# Altium PCB HS-1025_MAIN_PCB增加测试点修改_2025-04-26.pcbdoc (part 2 of 2)
Units mm, origin at the board's own origin, x right, y up, seen from the top; angles counter-clockwise.
Board outline 70 x 96.4 mm, 2 copper layers (Top Layer, Bottom Layer); 113 components, 41 nets, 228 pads, 296 vias.
Unrouted connection lines stored in the file: 1.
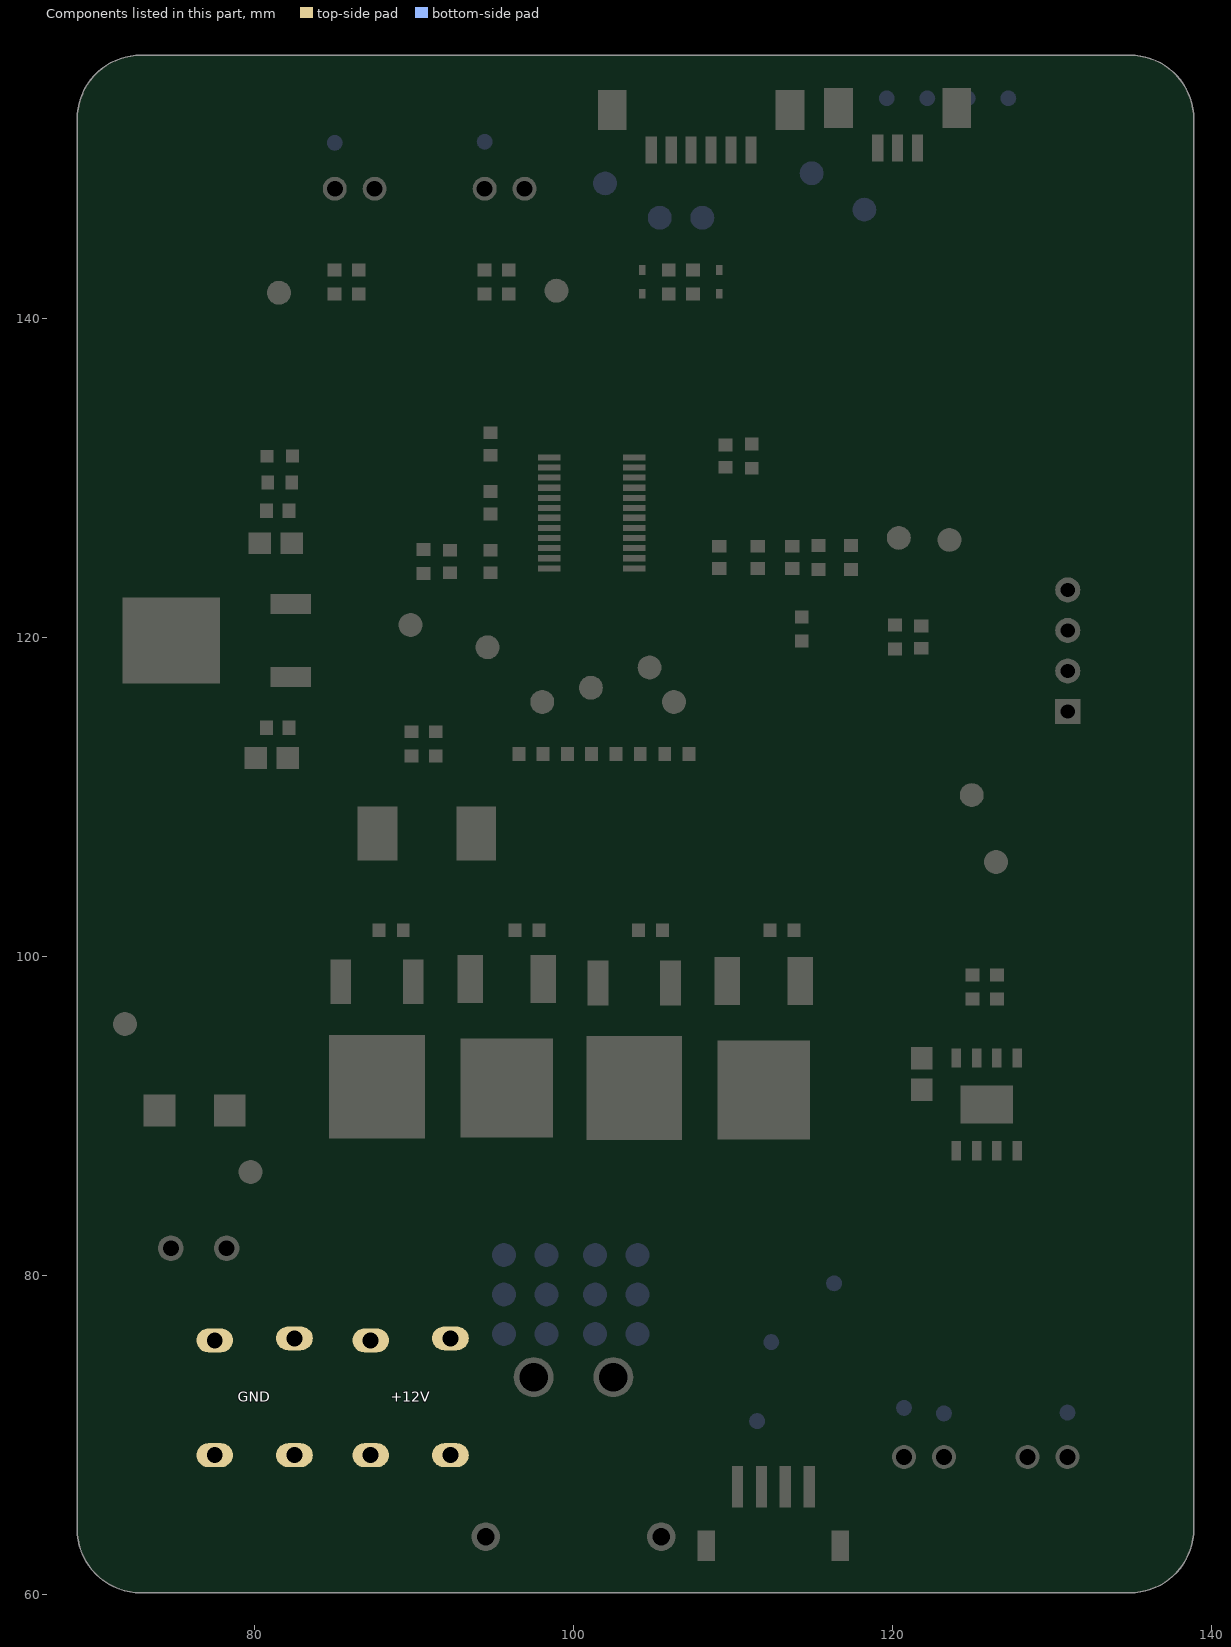
[diagram p2: the components of this part, seen from the top]

## Via types
v1: diameter 0.62, hole 0.31, Top Layer to Bottom Layer, tented both sides, 285 vias
v2: diameter 0.6, hole 0.406, Top Layer to Bottom Layer, 5 vias
v3: diameter 0.62, hole 0.31, Top Layer to Bottom Layer, 2 vias
v4: diameter 0.508, hole 0.35, Top Layer to Bottom Layer, 2 vias
v5: diameter 0.5, hole 0.35, Top Layer to Bottom Layer, 1 vias
v6: diameter 0.6, hole 0.4, Top Layer to Bottom Layer, 1 vias

## Nets (pads, with @x,y where several pads share a name; then routed paths per layer and width w, separated by ;. In a path a pad name is that pad's centre, name@x,y a point inside that pad or via, vN(x,y) a via of type N, cw(c..) or ccw(c..) an arc to the next point about the centre after c; other vN are vias at no path point) (continued)
pads on no net: EC25.1 EC25_1.1 EC25_1_1.1 EC25_2.1 EC25_2_1.1 EC25_3.1 EC29.1 EC29_1.1 EC29_1_1.1 EC29_2.1 EC29_2_1.1 EC29_3.1 EC87.1 EC116.1 EC117.1 EC118.1 EC119.1 EC120.1 EC121.1 EC122.1 EC123.1 EC125.1 EC126.1 EC127.1 FAN.5 FAN.6 TEC1.3 TEC1.4 U8.10 U8.11
copper on no net: | length 52.6
  Top Layer w0.3: 97.403,129.377 96.819,129.962 97.404,129.377 ; 97.403,129.377 98.47,129.377 97.404,129.377
  Bottom Layer w0.3: 96.82,129.962 105.869,129.962 107.488,128.343 107.488,124.501 108.545,123.444 123.436,123.444 124.333,122.547 ; 110.272,69.378 110.363,69.469 ; 112.395,75.819 112.454,75.76 112.454,74.422 ; 116.332,79.502 117.983,79.502 ; 123.884,122.995 126.443,120.437 130.983,120.437 ; 124.363,152.4 124.714,152.751 124.714,153.797 124.46,153.543 ; 126.903,152.146 127.254,152.497 127.254,153.797
  Bottom Layer w0.8: 110.272,68.453 110.272,69.378

## Polygon pours and split planes (outlines as drawn)
TEC_OUT1 on Bottom Layer "Bottom Layer-TEC_OUT1" (solid, pour order 10): 100.068,69.596 105.402,69.596 105.402,82.55 106.672,83.82 114.8,83.82 114.8,93.853 100.068,93.853 100.068,69.596
TEC_OUT2 on Bottom Layer "Bottom Layer-TEC_OUT2" (solid, pour order 8): 94.48,69.596 99.306,69.596 99.306,93.853 83.177,93.853 83.177,84.201 83.431,83.947 92.956,83.947 94.48,82.423 94.48,69.596
+12V on Bottom Layer "Bottom Layer-+12V" (solid, pour order 6): 81.907,97.409 104.386,97.409 104.386,97.028 104.386,94.107 82.288,94.107 81.399,93.345 81.399,96.774 81.526,96.901
+12V on Bottom Layer "Bottom Layer-+12V 1" (solid, pour order 4): 85.336,67.056 94.226,67.056 94.226,82.296 92.829,83.693 83.177,83.693 82.796,84.074 82.796,95.123 82.669,96.901 82.669,102.87 82.796,102.997 76.573,102.997 76.573,79.121 77.208,78.486 84.828,78.486 85.336,77.978 85.336,67.056
+12V on Bottom Layer "Bottom Layer-+12V 2" (solid, pour order 0): 79.675,96.688 79.675,103.038 104.386,102.997 104.386,96.647 79.675,96.688
GND on Bottom Layer "GND_L02_P034" (solid, remove dead copper, pour order 34): 140.208,148.082 140.208,155.702 ccw(c137.668,155.702) 137.668,158.242 92.964,158.242 69.596,158.242 ccw(c69.596,155.702) 67.056,155.702 67.056,148.717 67.056,60.833 ccw(c69.596,60.833) 69.596,58.293 76.708,58.293 137.668,58.293 ccw(c137.668,60.833) 140.208,60.833 140.208,61.595 140.208,142.24
GND on Top Layer "Top Layer-GND 1" (solid, pour order 30): 76.192,67.437 76.192,77.216 76.065,77.343 84.447,77.343 84.447,67.564 76.319,67.564 76.192,67.437
GND on Top Layer "Top Layer-GND 2" (solid, pour order 28): 89.781,110.109 89.527,110.109 84.701,110.109 84.701,105.664 84.574,105.537 89.781,105.537 89.781,109.982
+12V on Top Layer "Top Layer-+12V" (solid, pour order 26): 76.627,94.402 83.177,95.123 84.628,96.688 88.057,96.688 88.057,99.99 88.057,103.038 76.573,102.997 76.573,101.473 76.573,99.949 76.573,95.377 76.573,94.996 76.573,94.361
NetQ3_3 on Top Layer "Top Layer-Q3_3" (solid, pour order 24): 92.692,96.497 96.82,96.561 96.82,107.737 92.057,107.8 92.057,96.497
NetQ3_3 on Top Layer "Top Layer-Q3_3 1" (solid, pour order 22): 112.895,95.885 112.822,109.642 112.314,110.15 91.994,110.15 91.994,105.324 107.742,105.324 108.25,104.816 108.323,95.885
TEC_OUT2 on Top Layer "Top Layer-TEC_OUT2" (solid, pour order 20): 84.32,95.123 99.179,95.123 99.306,69.596 98.925,69.596 94.861,69.596 94.48,69.596 94.48,82.423 92.956,83.947 84.447,83.947 84.193,84.201 84.193,94.996 84.193,95.123
TEC_OUT1 on Top Layer "Top Layer-TEC_OUT1" (solid, pour order 18): 100.068,69.596 100.068,95.123 114.927,95.123 114.8,83.82 106.672,83.82 105.402,82.55 105.402,69.596 100.449,69.596 100.322,69.596
+12V on Top Layer "Top Layer-+12V 1" (solid, pour order 16): 99.741,96.307 99.741,103.038 104.44,103.038 104.513,95.885 99.941,95.885 99.814,95.885
+12V on Top Layer "Top Layer-+12V 2" (solid, pour order 14): 93.972,79.502 93.972,76.327 93.972,74.676 93.972,73.025 93.972,66.929 85.336,66.929 85.336,77.343 84.882,77.765 77.008,77.765 76.573,78.232 76.573,83.312 84.066,83.439 92.829,83.439 93.972,82.296 93.972,81.026
+12V on Top Layer "Top Layer-+12V 3" (solid, pour order 12): 76.573,95.504 76.573,91.694 76.573,87.757 76.573,80.01 85.644,80.178 85.59,80.772 85.463,81.661 83.685,84.074 83.685,95.758
GND on Top Layer "GND_L01_P032" (solid, remove dead copper, pour order 32): 140.208,148.082 140.208,155.702 ccw(c137.668,155.702) 137.668,158.242 92.964,158.242 69.596,158.242 ccw(c69.596,155.702) 67.056,155.702 67.056,148.717 67.056,60.833 ccw(c69.596,60.833) 69.596,58.293 76.708,58.293 137.668,58.293 ccw(c137.668,60.833) 140.208,60.833 140.208,61.595 140.208,142.24

## Keep-outs
Keep-Out Layer:
  circle w0.254: c72.999,64.169 r1.6
  circle w0.254: c134.999,64.169 r1.1
  circle w0.254: c134.999,152.569 r1.6
  circle w0.254: c72.999,152.569 r1.55
  lines w0.254: 68.878,64.099 ccw(c72.88,64.1) 72.878,60.099 134.878,60.099 ccw(c134.879,64.099) 138.878,64.099 138.878,152.499 ccw(c134.88,152.501) 134.878,156.499 72.878,156.499 ccw(c72.878,152.499) 68.878,152.499 68.879,64.099

## Other copper
Top Layer:
  region net NetC10_2: 119.639,126.191 120.435,126.987 119.772,127.066 119.56,126.854
  region net NetC9_2: 98.551,141.082 98.327,142.185 97.894,141.679 97.955,141.379
  region net NetC8_2: 82.063,142.129 81.979,141.007 82.533,141.379 82.555,141.679
  region net NetR9_2: 97.496,115.43 98.62,115.481 98.232,114.938 97.932,114.924
  region net NetR6_2: 100.544,116.319 101.668,116.37 101.257,115.826 101.003,115.814
  region net NetR6_2: 100.544,117.361 101.668,117.31 101.257,117.854 101.003,117.866
  region net NetR10_1: 104.748,117.36 104.025,118.223 103.902,117.552 104.066,117.357
  region net NetR10_1: 105.517,118.129 104.654,118.851 105.325,118.975 105.52,118.811
  region net NetR5_1: 106.479,115.225 105.547,115.855 105.592,115.191 105.846,115.019
  region net NetR5_1: 106.405,116.692 105.541,115.972 105.592,116.531 105.846,116.743
  region net NetR24_2: 95.328,119.172 94.723,120.121 95.387,120.056 95.549,119.802
  region net NetR24_2: 94.491,120.121 93.886,119.172 93.665,119.802 93.827,120.056
  region net NetR28_2: 90.334,121.283 90.214,120.165 90.562,120.489 90.605,120.892
  region net NetR28_2: 89.251,120.246 90.374,120.318 90.026,119.954 89.642,119.929
  region net NetR22_2: 131.525,69.117 130.4,69.117 130.813,69.642 131.113,69.642
  region net NetPUMP1_2: 123.778,69.117 122.653,69.117 122.965,69.642 123.465,69.642
  region net NetPUMP1_1: 121.278,69.117 120.153,69.117 120.466,69.642 120.966,69.642
  region net NetNTC2_2: 94.987,147.624 93.862,147.629 94.273,147.102 94.573,147.101
  region net NetNTC1_2: 85.589,147.624 84.464,147.629 84.875,147.102 85.175,147.101
  region net GND: 131.504,123.567 131.503,122.386 132.055,122.827 132.055,123.127
  region net +12V: 78.779,82.302 78.779,81.102 79.339,81.575 79.339,81.829
  region net NetR11_1: 124.424,109.584 125.548,109.643 125.163,109.097 124.863,109.081
  region net NetR11_1: 124.424,110.634 125.548,110.575 125.163,111.121 124.863,111.137
  region net NetR12_1: 125.948,105.393 127.072,105.452 126.687,104.906 126.387,104.89
  region net NetR12_1: 125.948,106.443 127.072,106.384 126.687,106.93 126.387,106.946
  region net NetCN1_3: 116.998,147.255 116.998,147.72 117.215,147.688 117.215,147.288
  region net NetCN1_3: 116.588,147.255 116.588,147.72 116.371,147.688 116.371,147.288
  region net NetCN1_2: 113.75,148.271 113.75,148.736 113.967,148.704 113.967,148.304
  region net NetCN1_2: 113.34,148.271 113.34,148.736 113.123,148.704 113.123,148.304
  region net NetCN1_4: 107.138,147.675 107.603,147.675 107.57,147.892 107.17,147.892
  region net NetCN1_4: 107.138,147.265 107.603,147.265 107.57,147.048 107.17,147.048
  region net NetCN1_5: 105.888,147.284 106.353,147.284 106.321,147.067 105.921,147.067
  region net NetCN1_5: 105.888,147.694 106.353,147.694 106.321,147.911 105.921,147.911
  region net VCC5V: 117.599,120.995 117.137,121.048 117.266,121.252 117.52,121.222
  region net +12V: 83.704,112.721 83.376,113.049 83.174,112.944 83.599,112.519
  region net +12V: 83.704,112.196 83.376,111.868 83.174,111.973 83.599,112.398
  region net VCC5V: 92.277,127.506 92.275,127.971 92.492,127.989 92.494,127.489
  region net VCC5V: 91.866,127.971 91.865,127.506 91.648,127.489 91.649,127.989
  region net NetFAN_3: 99.79,128.459 99.79,128.924 99.573,128.842 99.573,128.542
  region: 97.129,129.981 96.8,129.652 97.012,129.557 97.224,129.769
  region net NetC9_2: 97.03,141.291 97.019,141.756 97.238,141.679 97.245,141.379
  region net NetC9_2: 96.62,141.756 96.609,141.291 96.394,141.379 96.401,141.679
  region net NetC9_2: 96.615,141.286 96.615,141.751 96.398,141.669 96.398,141.369
  region net NetC8_2: 83.661,141.761 83.66,141.296 83.443,141.379 83.444,141.679
  region net NetC8_2: 84.072,141.296 84.07,141.761 84.287,141.679 84.288,141.379
  region net NetC8_2: 84.072,141.296 84.07,141.761 84.287,141.679 84.288,141.379
  region net NetC8_2: 109.986,125.511 109.918,125.971 109.715,125.86 109.759,125.56
  region net NetC9_2: 112.274,125.905 112.202,125.446 112,125.56 112.048,125.86
  region net NetR22_2: 118.163,125.612 118.014,126.053 117.832,125.913 117.933,125.613
  region net NetR22_2: 128.845,125.693 129.31,125.693 129.228,125.476 128.928,125.476
  region net +12V: 89.659,124.225 89.659,123.76 89.876,123.843 89.876,124.143
  region net +12V: 93.85,125.749 93.85,125.284 94.067,125.367 94.067,125.667
  region net NetR9_2: 98.318,114.169 97.853,114.16 97.932,114.379 98.232,114.385
  region net NetR9_2: 98.318,113.75 97.853,113.759 97.932,113.541 98.232,113.535
  region net NetR9_2: 98.321,113.753 97.856,113.756 97.96,113.539 98.214,113.537
  region net NetR9_2: 97.179,123.69 96.714,123.69 96.819,123.865 97.073,123.866
  region net NetQ1_1: 104.417,111.754 103.952,111.75 104.055,111.968 104.309,111.97
  region net NetQ1_1: 105.807,103.722 105.342,103.722 105.448,103.505 105.702,103.505
  region net NetQ4_1: 99.848,111.75 99.383,111.754 99.49,111.97 99.744,111.968
  region net NetQ4_1: 98.363,103.744 98.034,104.073 97.955,103.845 98.135,103.666
  region net NetQ2_1: 96.8,111.75 96.335,111.754 96.442,111.97 96.696,111.968
  region net NetQ2_1: 90.308,103.958 89.98,104.286 89.901,104.058 90.08,103.879
  region net +12V: 80.456,96.759 80.127,97.088 80.048,96.86 80.228,96.681
  region net NetCN1_3: 120.665,149.832 119.964,149.832 120.114,149.232 120.514,149.232
  region net NetCN1_2: 119.415,149.832 118.714,149.832 118.865,149.232 119.265,149.232
  region net NetCN1_4: 107.721,149.705 107.02,149.705 107.17,149.105 107.57,149.105
  region net NetCN1_3: 108.971,149.705 108.272,149.705 108.42,149.105 108.82,149.105
  region net NetCN1_2: 110.22,149.705 109.522,149.705 109.67,149.105 110.07,149.105
  region net NetCN1_5: 106.471,149.705 105.77,149.705 105.921,149.105 106.321,149.105
  region net VCC5V: 105.222,149.705 104.521,149.705 104.521,149.189 105.221,149.189
  region net NetC7_1: 127.508,94.226 128.107,94.226 127.957,94.676 127.657,94.676
  region net NetR12_2: 126.238,94.226 126.837,94.226 126.687,94.676 126.387,94.676
  region net NetR11_2: 124.968,94.226 125.567,94.226 125.417,94.676 125.117,94.676
  region net NetPUMP1_1: 124.297,87.211 123.698,87.211 123.747,86.461 124.247,86.461
  region net NetPUMP1_2: 128.107,87.211 127.508,87.211 127.557,86.461 128.057,86.461
  region net VCC5V: 81.028,122.725 83.528,122.725 82.778,124.225 81.778,124.225
  region net +12V: 83.528,116.878 81.028,116.878 81.778,115.654 82.778,115.654
  region net NetR28_2: 89.517,114.48 90.152,114.48 89.961,114.861 89.707,114.861
  region net GND: 89.517,112.169 90.152,112.169 89.961,111.788 89.707,111.788
  region net NetD3_2: 107.862,141.125 107.112,141.125 107.337,140.675 107.637,140.675
  region net NetD3_2: 107.919,141.904 107.919,141.154 108.369,141.379 108.369,141.679
  region net NetCN1_4: 107.87,143.436 107.055,143.436 107.17,144.036 107.57,144.036
  region net NetD2_2: 106.338,141.125 105.588,141.125 105.813,140.675 106.113,140.675
  region net NetD2_2: 105.531,141.154 105.531,141.904 105.081,141.68 105.081,141.38
  region net NetCN1_5: 106.395,143.436 105.621,143.436 105.921,144.036 106.321,144.036
  region net NetC13_2: 91.028,125.831 91.028,125.105 91.478,125.306 91.478,125.606
  region net +12V: 90.164,124.368 90.164,123.618 89.714,123.843 89.714,124.143
  region net NetR24_2: 91.041,114.48 91.676,114.48 91.485,114.861 91.231,114.861
  region net NetQ3_3: 91.041,112.169 91.676,112.169 91.485,111.788 91.231,111.788
  region net VCC5V: 117.711,123.853 117.076,123.853 117.266,123.472 117.52,123.472
  region net NetR22_2: 117.825,125.388 117.825,126.138 118.148,125.913 118.148,125.613
  region net NetR22_2: 116.961,126.138 116.961,125.388 116.624,125.613 116.624,125.913
  region net NetR22_2: 115.793,124.632 115.793,123.882 116.133,124.107 116.133,124.407
  region net NetC10_2: 115.736,126.164 114.986,126.164 115.211,126.614 115.511,126.614
  region net NetC10_2: 114.929,126.138 114.929,125.388 114.479,125.613 114.479,125.913
  region net VCC5V: 93.974,141.125 93.974,141.93 92.924,141.879 92.924,141.179
  region net NetNTC2_2: 94.783,143.436 94.033,143.436 94.26,143.886 94.56,143.886
  region net NetNTC2_2: 94.838,142.66 94.838,143.41 95.288,143.185 95.288,142.885
  region net NetNTC2_2: 95.498,142.66 95.498,143.41 95.048,143.185 95.048,142.885
  region net NetC9_2: 96.362,141.154 96.362,141.904 96.812,141.679 96.812,141.379
  region net NetC9_2: 96.362,141.144 96.362,141.894 96.812,141.669 96.812,141.369
  region net NetNTC1_2: 84.635,143.436 85.385,143.436 85.162,143.886 84.862,143.886
  region net NetNTC1_2: 85.44,143.41 85.44,142.66 85.89,142.885 85.89,143.185
  region net NetC8_2: 84.576,141.904 84.576,141.154 84.126,141.379 84.126,141.679
  region net NetC8_2: 84.576,141.904 84.576,141.154 84.126,141.379 84.126,141.679
  region net VCC5V: 86.964,141.93 86.964,141.125 88.014,141.179 88.014,141.879
  region net VCC5V: 86.964,141.125 86.1,141.125 86.182,140.075 86.882,140.075
  region net NetNTC1_2: 86.1,143.41 86.1,142.66 85.65,142.885 85.65,143.185
  region net NetC7_1: 110.738,130.982 110.738,130.232 110.288,130.457 110.288,130.757
  region net NetC7_1: 111.602,130.232 111.602,130.982 112.052,130.757 112.052,130.457
  region net NetQ2_1: 89.001,102.072 89.636,102.072 89.446,102.453 89.192,102.453
  region net NetQ2_1: 89.723,101.952 89.624,101.209 89.843,101.039 89.973,101.333
  region net NetQ1_1: 105.257,102.072 105.892,102.072 105.702,102.453 105.448,102.453
  region net NetQ1_1: 105.979,101.804 105.522,101.209 105.961,101.042 106.145,101.282
  region net NetQ4_1: 97.51,102.072 98.145,102.072 97.955,102.453 97.701,102.453
  region net NetQ3_1: 113.512,102.072 114.147,102.072 113.957,102.453 113.703,102.453
  region net NetLED1_2: 80.424,130.139 81.229,130.139 81.029,130.889 80.529,130.889
  region net VCC5V: 82.738,129.276 82.738,130.139 83.788,130.058 83.788,129.358
  region net NetQ4_1: 97.719,100.089 98.469,100.089 98.244,100.539 97.944,100.539
  region net NetQ3_1: 113.848,99.962 114.598,99.962 114.373,100.412 114.073,100.412
  region net NetQ2_1: 89.574,99.804 90.324,99.804 90.099,100.254 89.799,100.254
  region net NetQ1_1: 105.703,99.728 106.453,99.728 106.228,100.178 105.928,100.178
  region net NetLED1_2: 81.181,130.955 80.38,130.955 80.529,130.205 81.029,130.205
  region net NetD3_2: 108.938,141.232 108.938,141.831 108.762,141.681 108.762,141.381
  region net NetD2_2: 104.513,141.831 104.513,141.232 104.963,141.38 104.963,141.68
  region net +12V: 78.127,91.338 78.762,91.338 78.572,91.719 78.318,91.719
  region net VCC5V: 95.237,128.114 95.237,127.364 95.687,127.589 95.687,127.889
  region net VCC5V: 94.338,127.338 94.338,128.138 93.588,127.989 93.588,127.489
  region net GND: 95.237,129.514 95.237,128.764 95.687,128.989 95.687,129.289
  region net NetC13_2: 91.872,125.854 92.622,125.854 92.397,126.279 92.097,126.279
  region net NetC13_2: 91.798,125.081 91.798,125.831 91.348,125.606 91.348,125.306
  region net GND: 92.697,124.429 92.697,123.679 93.147,123.904 93.147,124.204
  region net +12V: 94.496,125.854 95.237,125.854 95.351,126.122 95.032,126.228
  region net +12V: 94.338,125.142 94.338,125.854 93.888,125.667 93.888,125.367
  region net GND: 94.338,123.679 94.338,124.429 93.888,124.204 93.888,123.904
  region: 95.237,131.657 95.237,131.021 95.687,131.132 95.687,131.432
  region net NetC10_2: 113.389,126.108 114.139,126.108 113.914,126.558 113.614,126.558
  region net NetC10_2: 114.16,126.108 114.16,125.388 114.61,125.613 114.61,125.913
  region net NetC9_2: 111.176,126.108 111.926,126.108 111.701,126.152 111.401,126.152
  region net NetC9_2: 112.001,126.085 112.001,125.335 112.377,125.56 112.377,125.86
  region net NetC8_2: 109.588,126.085 109.588,125.335 110.038,125.56 110.038,125.86
  region net NetC8_2: 108.689,125.335 108.689,126.085 108.239,125.86 108.239,125.56
  region net NetC7_1: 109.07,130.259 109.07,130.982 108.62,130.757 108.62,130.457
  region net NetC7_1: 109.969,130.982 109.969,130.259 110.419,130.457 110.419,130.757
  region net VCC5V: 82.552,128.364 82.552,127.48 83.302,127.489 83.302,127.989
  region net +12V: 121.163,94.328 122.514,94.328 122.238,94.694 121.438,94.694
  region net +12V: 122.514,94.328 122.514,92.918 123.616,93.224 123.616,94.024
  region net VCC5V: 83.03,125.222 81.62,125.222 81.778,123.722 82.778,123.722
  region net VCC5V: 81.62,126.573 83.03,126.573 82.834,128.073 81.834,128.073
  region net +12V: 82.776,113.111 82.776,111.76 83.136,112.136 83.136,112.736
  region net +12V: 82.776,113.111 82.776,111.899 83.05,112.349 83.05,112.949
  region net +12V: 82.776,113.111 82.776,111.76 83.599,112.036 83.599,112.836
  region net NetD2_2: 99.169,130.838 99.169,130.457 99.619,130.497 99.619,130.797
  region net NetD3_2: 99.169,130.203 99.169,129.822 99.619,129.862 99.619,130.162
  region: 97.772,129.187 97.772,129.568 97.403,129.527 97.403,129.227
  region net GND: 97.772,127.917 97.772,128.298 97.322,128.257 97.322,127.957
  region net VCC5V: 97.772,127.307 97.772,127.688 97.322,127.648 97.322,127.348
  region net NetC13_2: 97.772,126.672 97.772,127.053 97.322,127.013 97.322,126.713
  region net +12V: 97.772,126.037 97.772,126.418 97.322,126.378 97.322,126.078
  region net NetR9_2: 97.772,124.132 97.772,124.513 97.403,124.45 97.403,124.196
  region net NetR6_2: 104.503,124.513 104.503,124.132 104.884,124.196 104.884,124.45
  region net NetR10_1: 104.503,125.148 104.503,124.767 104.884,124.831 104.884,125.085
  region net NetR5_1: 104.503,125.783 104.503,125.402 104.884,125.466 104.884,125.72
  region net NetC8_2: 104.503,126.418 104.503,126.037 104.953,126.078 104.953,126.378
  region net NetC9_2: 104.503,127.053 104.503,126.672 104.953,126.713 104.953,127.013
  region net NetC10_2: 104.503,127.688 104.503,127.307 104.953,127.348 104.953,127.648
  region net NetR11_1: 104.503,128.298 104.503,127.917 104.953,127.957 104.953,128.257
  region net NetR12_1: 104.503,129.568 104.503,129.187 104.953,129.227 104.953,129.527
  region net NetC7_1: 104.503,130.203 104.503,129.822 104.953,129.862 104.953,130.162
  region net NetR24_2: 103.106,130.457 103.106,130.838 102.725,130.774 102.725,130.52
  region net NetR28_2: 103.106,131.092 103.106,131.473 102.725,131.409 102.725,131.155
  region net NetR12_2: 126.912,96.929 126.162,96.929 126.387,96.479 126.687,96.479
  region net NetR12_1: 126.912,99.24 126.162,99.24 126.387,99.69 126.687,99.69
  region net NetR11_2: 125.388,96.929 124.638,96.929 124.863,96.479 125.163,96.479
  region net NetR11_1: 125.388,99.24 124.638,99.24 124.863,99.69 125.163,99.69
  region net NetQ1_1: 104.498,112.258 103.863,112.258 104.056,111.877 104.31,111.877
  region net NetR10_1: 102.989,113.121 102.354,113.121 102.544,113.502 102.798,113.502
  region net NetR9_2: 97.707,113.121 98.457,113.121 98.232,113.571 97.932,113.571
  region net NetR9_2: 97.767,113.121 98.402,113.121 98.214,113.502 97.96,113.502
  region net NetQ2_1: 96.254,112.258 96.889,112.258 96.695,111.877 96.441,111.877
  region net NetR6_2: 100.812,113.121 101.447,113.121 101.257,113.502 101.003,113.502
  region net NetQ4_1: 99.302,112.258 99.937,112.258 99.743,111.877 99.489,111.877
  region net NetQ3_1: 107.627,113.007 107.627,112.372 108.008,112.563 108.008,112.817
  region net NetR5_1: 106.037,113.121 105.402,113.121 105.592,113.502 105.846,113.502
  region net NetQ3_3: 92.946,109.395 93.581,109.395 93.39,109.776 93.136,109.776
  region net GND: 87.612,109.395 88.247,109.395 88.056,109.776 87.802,109.776
  region net +12V: 91.963,69.477 92.598,69.477 92.407,69.858 92.153,69.858
  region net +12V: 92.079,75.33 91.453,75.437 91.485,75.045 91.918,74.971
  region net +12V: 91.265,75.626 91.157,76.252 90.798,76.091 90.873,75.658
Bottom Layer:
  region net NetCN1_3: 117.48,146.765 118.276,147.561 117.695,147.629 117.412,147.346
  region net NetCN1_2: 114.178,149.145 114.974,148.349 114.474,148.362 114.191,148.645
  region net NetCN1_5: 105.355,147.053 106.15,146.257 106.298,146.846 105.944,147.2
  region net NetCN1_4: 107.32,146.257 108.116,147.053 107.547,147.179 107.194,146.826
  region net VCC5V: 102.469,147.901 102.469,149.025 102.994,148.713 102.994,148.213
  region net NetFAN_3: 130.462,118.487 130.462,117.306 129.911,117.747 129.911,118.047
  region: 130.462,121.027 130.462,119.846 129.911,120.287 129.911,120.587
  region net NetCN1_3: 116.998,147.255 116.998,147.72 117.215,147.688 117.215,147.288
  region net NetCN1_2: 113.75,148.271 113.75,148.736 113.967,148.704 113.967,148.304
  region net NetCN1_4: 107.138,147.265 107.603,147.265 107.62,147.048 107.12,147.048
  region net NetCN1_5: 105.888,147.284 106.353,147.284 106.371,147.067 105.871,147.067
  region net VCC5V: 103.546,148.23 103.546,148.696 103.329,148.713 103.329,148.213
  region net VCC5V: 103.546,148.23 103.546,148.696 103.329,148.713 103.329,148.213
  region net VCC5V: 103.355,148.715 103.31,148.252 103.525,148.213 103.573,148.713
  region net VCC5V: 103.355,148.715 103.31,148.252 103.525,148.213 103.573,148.713
  region net VCC5V: 102.947,148.252 102.902,148.715 102.684,148.713 102.733,148.213
  region net VCC5V: 117.55,120.585 117.55,121.05 117.767,120.968 117.767,120.668
  region net VCC5V: 117.14,120.585 117.139,121.05 116.923,120.968 116.922,120.668
  region net VCC5V: 92.276,127.97 92.275,127.505 92.492,127.587 92.493,127.887
  region net NetFAN_3: 100.2,128.459 100.2,128.924 100.417,128.842 100.417,128.542
  region: 97.025,129.729 97.025,130.194 97.242,130.112 97.242,129.812
  region net NetC9_2: 97.025,141.286 97.025,141.751 97.242,141.669 97.242,141.369
  region net NetC8_2: 84.175,141.547 83.846,141.218 84.058,141.123 84.27,141.335
  region net NetC8_2: 109.922,125.976 110.387,125.976 110.305,126.193 110.005,126.193
  region net NetC9_2: 112.208,125.849 112.673,125.849 112.591,126.066 112.291,126.066
  region net NetR22_2: 118.488,125.665 118.488,126.13 118.705,126.048 118.705,125.748
  region net NetR22_2: 128.873,125.665 128.873,126.13 128.656,126.048 128.656,125.748
  region net +12V: 82.484,115.421 82.484,115.886 82.701,115.804 82.701,115.504
  region net +12V: 89.659,123.76 89.659,124.225 89.876,124.143 89.876,123.843
  region net +12V: 89.614,123.727 89.17,123.867 89.177,123.638 89.477,123.543
  region net +12V: 93.805,125.251 93.361,125.391 93.368,125.162 93.668,125.067
  region net NetR9_2: 98.109,114.269 97.78,113.94 97.702,114.169 97.881,114.348
  region net NetR9_2: 96.714,123.28 97.179,123.28 97.074,123.063 96.82,123.063
  region net NetQ1_1: 103.953,111.342 104.418,111.342 104.313,111.125 104.059,111.125
  region net NetQ1_1: 105.369,103.694 105.369,104.159 105.152,104.054 105.152,103.8
  region net NetQ4_1: 99.381,111.342 99.846,111.342 99.741,111.125 99.487,111.125
  region net NetQ4_1: 98.549,103.821 98.549,104.286 98.725,104.181 98.725,103.927
  region net NetQ2_1: 96.333,111.342 96.798,111.342 96.693,111.125 96.439,111.125
  region net NetQ2_1: 90.494,104.034 90.494,104.5 90.711,104.394 90.711,104.14
  region net +12V: 102.556,98.036 103.021,98.036 102.916,98.253 102.662,98.253
  region net +12V: 103.051,97.996 102.92,97.55 103.153,97.573 103.235,97.851
  region net +12V: 102.556,98.388 103.021,98.388 102.916,98.171 102.662,98.171
  region net +12V: 103.333,97.158 103.755,97.352 103.577,97.509 103.33,97.396
  region net VCC5V: 130.195,114.982 130.195,115.732 129.89,115.507 129.89,115.207

## Silkscreen, mask and mechanical layers (free items; w line width, h text height)
Top Overlay:
  drawing of 351 lines, arcs and shapes, not listed
  text "FAN端子线序与端口修改;" at 83.058,165.481 h1.52
  text "V1.3" at 70.866,165.354 h1.52
  text "2025/3/14" at 75.565,165.354 h1.52
  text "HS-1025 MAIN" at 120.388,141.363 h3
  text "96.4*70*1.6mm_250422 V1.4" at 115.062,139.446 h2
  text "94V-0" at 115.189,137.668 h2
  text "GND" at 126.611,122.055 h1
  text "SWCLK" at 124.579,119.515 h1
  text "SWDIO" at 125.087,116.848 h1
  text "+5V" at 126.357,114.181 h1
  text "S1025-M0-A0" at 95.758,64.77 h1.52
Bottom Overlay:
  text "VCC" at 126.746,150.114 h1.52 r270
  text "GND" at 119.126,149.733 h1.52 r270
Top Solder:
  lines w0.6: 93.083,102.997 93.083,105.156 ; 94.226,101.473 94.226,104.14 ; 95.496,103.886 95.496,106.299 ; 96.194,107.061 99.369,107.061 ; 96.385,109.474 99.179,109.474 ; 97.972,106.045 101.147,106.045 ; 98.226,108.331 100.893,108.331 ; 100.703,109.601 104.132,109.601 ; 100.766,107.061 104.449,107.061 ; 102.671,108.331 106.608,108.331 ; 104.132,106.045 108.831,106.045 ; 105.783,109.601 109.466,109.601 ; 106.164,107.061 111.117,107.061 ; 108.196,108.331 111.752,108.331 ; 109.339,101.727 109.339,104.902 ; 110.355,100.965 110.355,103.505 ; 110.99,104.648 110.99,106.299 ; 112.26,104.648 112.26,107.569
Bottom Solder:
  circle w0.8: c89.789,80.518 r0.254
  circle w0.8: c74.93,74.803 r0.254
  circle w0.8: c74.93,73.152 r0.254
  circle w0.8: c74.93,71.374 r0.254
  circle w0.8: c74.93,69.596 r0.254
  circle w0.8: c89.789,78.74 r0.254
  circle w0.8: c91.44,78.74 r0.254
  circle w0.8: c88.138,78.74 r0.254

## Dimensions
134.878,156.499 to 134.878,60.099 on Top Overlay
68.878,152.499 to 138.878,152.499 on Top Overlay

## Text inside footprints (layer, text, board x,y; h text height)
EC85: Top Overlay "版本" at 70.942,163.601 h1.52; Top Overlay "日期" at 76.911,163.601 h1.52; Top Overlay "修改原因" at 97.892,163.525 h1.52
EC86: Top Overlay "E252800" at 124.562,132.944 h1.52; Top Overlay "JD-F" at 124.866,135.915 h1.52; Top Overlay "94V-0 1.6mm" at 120.244,130.708 h1.52
EC87: Top Overlay "0.5" at 178.204,27.608 h3.5; Top Overlay "0.3" at 178.331,32.384 h3.5; Top Overlay "0.2" at 178.103,37.565 h3.5; Top Overlay "0.1" at 178.105,42.469 h3.5; Top Overlay ">120-400" at 157.96,27.38 h3.5; Top Overlay ">30-120" at 158.545,32.13 h3.5; Top Overlay ">6-30" at 160.119,37.286 h3.5; Top Overlay ">0.5-6" at 160.323,41.756 h3.5; Top Overlay "公差mm" at 175.105,47.624 h3.5; Top Overlay "尺寸cm" at 160.221,47.624 h3.5; Top Overlay "ZD-95(G)F" at 140.792,42.367 h3.5; Top Overlay "ZD-90F" at 143.127,47.878 h3.5; Top Overlay "KB-3151" at 123.594,47.776 h3.5; Top Overlay "KB-5150" at 123.62,42.518 h3.5; Top Overlay "8mm" at 177.544,22.554 h3.5; Top Overlay "6mm" at 163.548,22.579 h3.5; Top Overlay "4mm" at 148.258,22.224 h3.5; Top Overlay "工艺孔,工艺点离铜箔须大于1mm" at 141.072,17.272 h3.5; Top Overlay "机械板边" at 128.854,22.301 h3.5; Top Overlay "镀金" at 96.088,22.555 h3.5; Top Overlay "沉金" at 115.291,22.352 h3.5; Top Overlay "ILM-R1" at 142.72,37.413 h3.5; Top Overlay "KB-6160" at 123.772,37.235 h3.5; Top Overlay "70uM" at 143.609,27.558 h3.5; Top Overlay "35uM" at 125.296,27.964 h3.5; Top Overlay "≥175" at 124.61,32.688 h3.5; Top Overlay "18uM" at 107.186,27.837 h3.5; Top Overlay "≥100" at 107.033,33.095 h3.5; Top Overlay "FR-4" at 107.592,37.667 h3.5; Top Overlay "CEM-1" at 106.756,42.647 h3.5; Top Overlay "≥600" at 143.482,32.536 h3.5; Top Overlay "铜厚" at 93.345,27.153 h3.5; Top Overlay "CTI" at 93.853,32.309 h3.5; Top Overlay "喷锡" at 77.191,22.454 h3.5; Top Overlay "绿油黑字" at 76.452,32.714 h3.5; Top Overlay "板材" at 94.156,42.798 h3.5; Top Overlay "2.0mm" at 77.569,37.794 h3.5; Top Overlay "1.2mm" at 77.163,42.696 h3.5; Top Overlay "PCB板上需印防火等级,认证号,板材型号(不能被遮档)" at 56.564,12.495 h3.5; Top Overlay "供应商的相关丝印请放在大元件底部(DIP后不能看到)" at 56.462,17.55 h3.5; Top Overlay "抗氧化" at 56.794,22.606 h3.5; Top Overlay "白油黑字" at 56.21,27.686 h3.5; Top Overlay "绿油白字" at 56.186,32.92 h3.5; Top Overlay "1.6mm" at 56.97,37.972 h3.5; Top Overlay "1.0mm" at 57.224,42.823 h3.5; Top Overlay "特殊工艺" at 38.075,15.316 h3.5; Top Overlay "工艺" at 40.993,22.579 h3.5; Top Overlay "油墨" at 40.919,30.505 h3.5; Top Overlay "板厚" at 40.335,40.03 h3.5; Top Overlay "FR-1" at 107.899,47.6 h3.5; Top Overlay "双层板" at 77.29,47.598 h3.5; Top Overlay "单层板" at 57.072,47.852 h3.5; Top Overlay "板层" at 40.714,47.598 h3.5; Top Overlay "遮光黑油" at 76.454,27.635 h3.5
U8: Top Overlay "24" at 103.886,132.334 h0.76; Top Overlay "13" at 103.677,122.977 h0.76; Top Overlay "12" at 97.663,122.682 h0.76